# Altium PCB PCB1.PcbDoc
Units mil, origin at the board's own origin, x right, y up, seen from the top; angles counter-clockwise.
Board outline 6000 x 4000 mil, 2 copper layers (Top Layer, Bottom Layer); 132 components, 85 nets, 527 pads, 0 vias.
Unrouted connection lines stored in the file: 195.
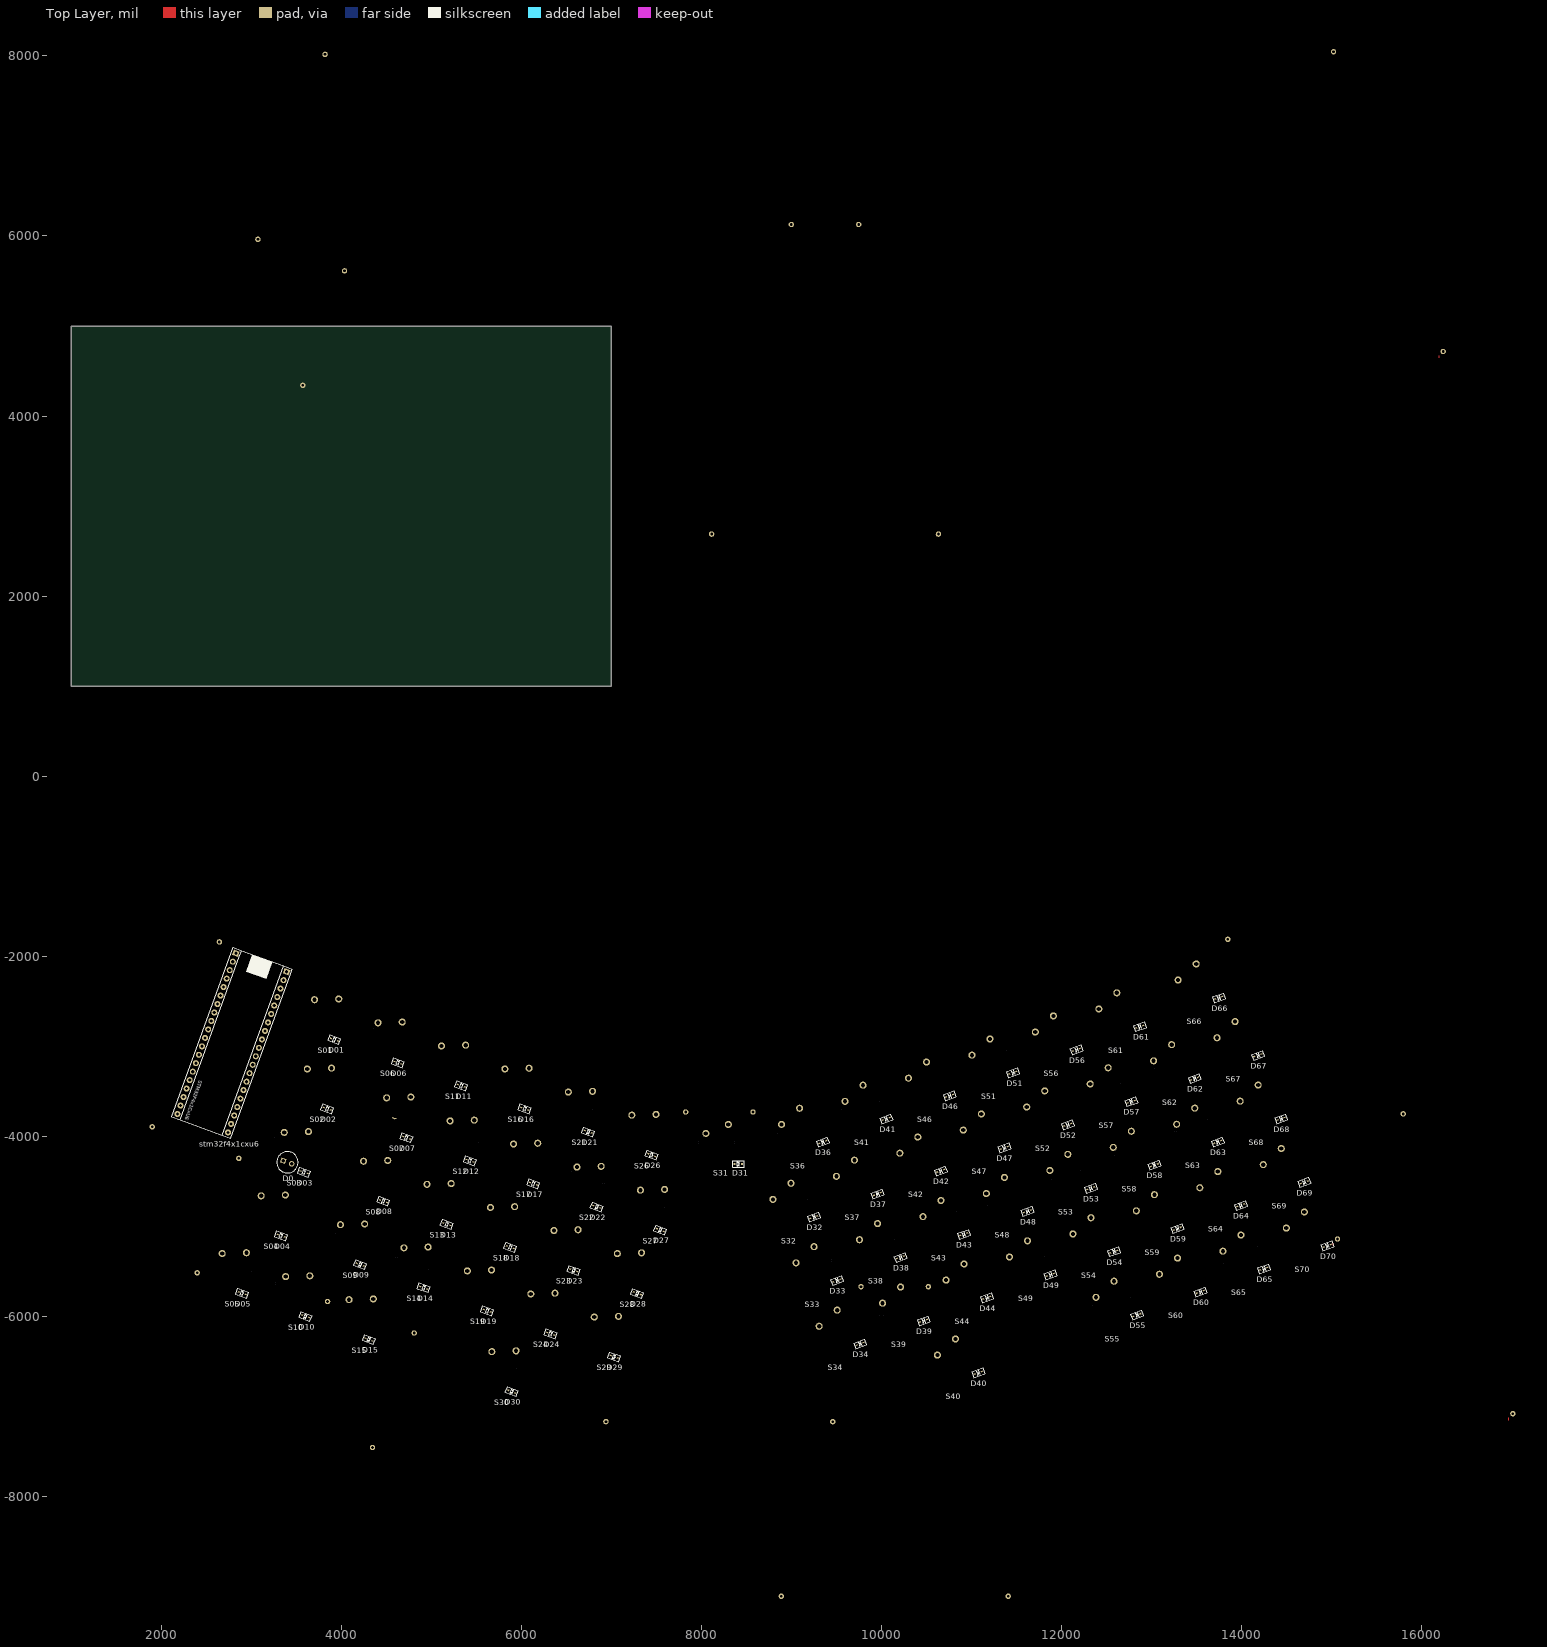
[diagram p0: Top Layer view]
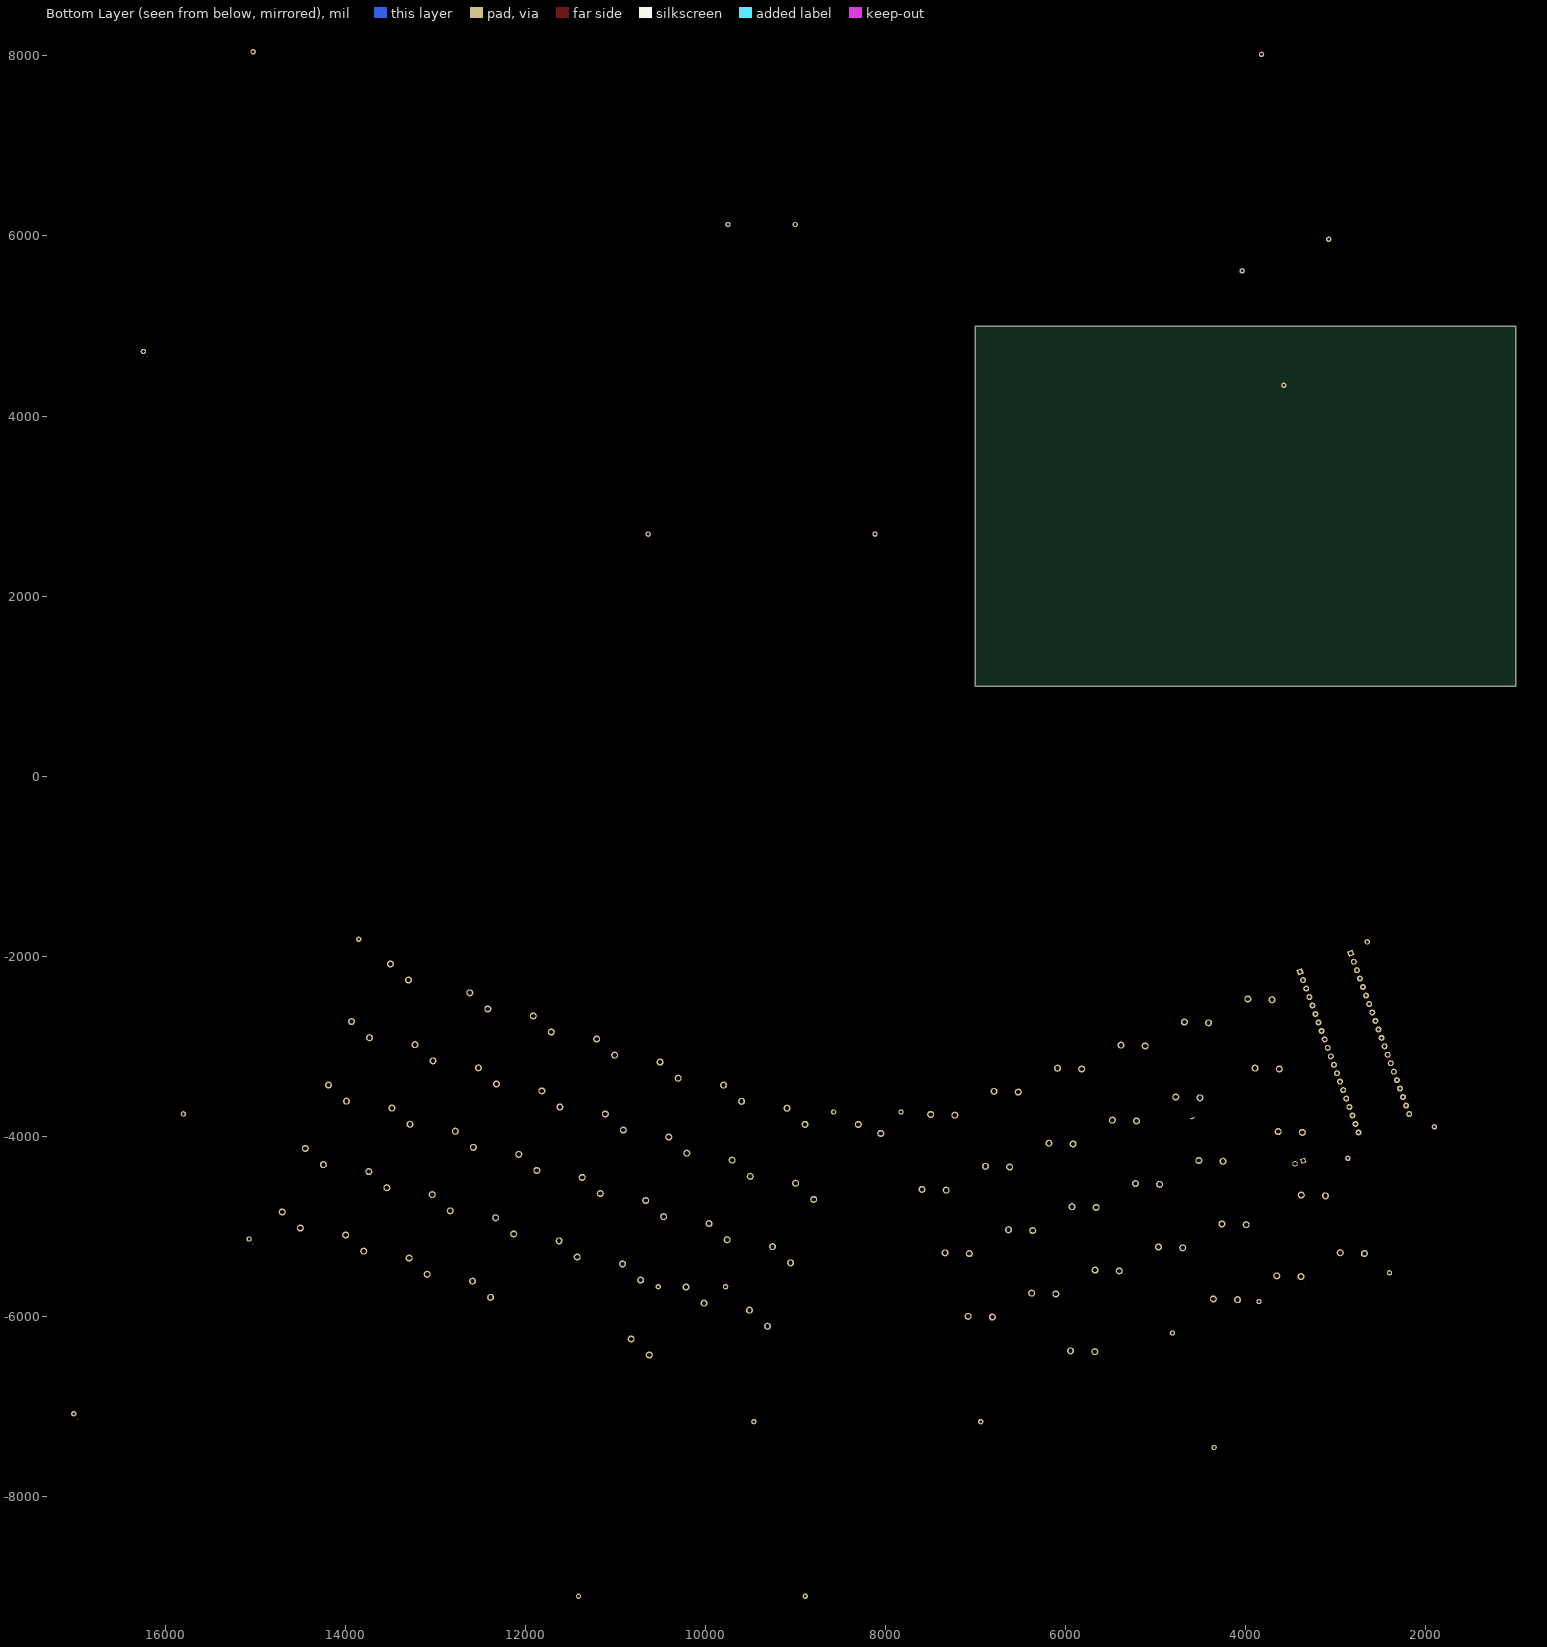
[diagram p1: Bottom Layer view, seen from below]

## Layer stack, top to bottom
Top Solder: solder mask 0.4, Solder Resist, Dk 3.5
Top Layer: signal copper 1.4
Dielectric 1: dielectric 12.6, FR-4, Dk 4.8
Bottom Layer: signal copper 1.4
Bottom Solder: solder mask 0.4, Solder Resist, Dk 3.5

## Board outline
1000,1000 7000,1000 7000,5000 1000,5000

## Design rules (kind name [scope] priority, off if disabled: settings)
Clearance [All] p1: gap=10 ignorepadtopadclearanceinfootprint=FALSE except(0: Arc-Hole Track-Hole SMDPad-Hole THPad-Hole Via-Hole Fill-Hole Poly-Hole Region-Hole Text-Hole)
PolygonConnect [All] p1: connectstyle=Relief reliefconductorwidth=10 reliefentries=4 polygonreliefangle="90 Angle" airgapwidth=10
RoomDefinition Matrix [InComponentClass('Matrix')] p1: confinementstyle=ConfineIn formatcopy=TRUE lockcomponents=FALSE outline 0,0 2000,0 2000,1000 0,1000
RoutingVias [All] p1: holewidth=28 width=50 viastyle="Through Hole" minholewidth=28 minwidth=50 maxholewidth=28 maxwidth=50
SolderMaskExpansion [All] p1: expansion=4
Width [All] p1: maxlimit=10 minlimit=10 preferedwidth=10
30 further rules are at their usual default settings.

## Components (designator, comment, footprint, x,y, rotation, side; value= is the part's Value field where it differs from the comment)
D0 "LED0" LED 3403.93,-4289.95 r340 top
D01 "1N4148" SOD323 3926.78,-2926.55 r160 top
D02 "1N4148" SOD323 3847.36,-3695.78 r160 top
D03 "1N4148" SOD323 3588.49,-4399.69 r160 top
D04 "1N4148" SOD323 3334.33,-5105.32 r160 top
D05 "1N4148" SOD323 2900.71,-5745.63 r160 top
D06 "1N4148" SOD323 4631.54,-3183.06 r160 top
D07 "1N4148" SOD323 4727.41,-4016.09 r160 top
D08 "1N4148" SOD323 4470.9,-4720.86 r160 top
D09 "1N4148" SOD323 4214.38,-5425.63 r160 top
D10 "1N4148" SOD323 3605.48,-6002.14 r160 top
D11 "1N4148" SOD323 5336.31,-3439.58 r160 top
D12 "1N4148" SOD323 5432.18,-4272.61 r160 top
D13 "1N4148" SOD323 5175.67,-4977.38 r160 top
D14 "1N4148" SOD323 4919.15,-5682.15 r160 top
D15 "1N4148" SOD323 4310.25,-6258.66 r160 top
D16 "1N4148" SOD323 6041.08,-3696.09 r160 top
D17 "1N4148" SOD323 6136.95,-4529.12 r160 top
D18 "1N4148" SOD323 5880.44,-5233.89 r160 top
D19 "1N4148" SOD323 5623.92,-5938.66 r160 top
D21 "1N4148" SOD323 6745.85,-3952.61 r160 top
D22 "1N4148" SOD323 6841.72,-4785.64 r160 top
D23 "1N4148" SOD323 6585.21,-5490.41 r160 top
D24 "1N4148" SOD323 6328.69,-6195.18 r160 top
D26 "1N4148" SOD323 7450.62,-4209.12 r160 top
D27 "1N4148" SOD323 7546.49,-5042.15 r160 top
D28 "1N4148" SOD323 7289.98,-5746.92 r160 top
D29 "1N4148" SOD323 7033.46,-6451.69 r160 top
D30 "1N4148" SOD323 5896.89,-6836.15 r160 top
D31 "1N4148" SOD323 8412.48,-4309.25 r180 top
D32 "1N4148" SOD323 9251.21,-4898.5 r200 top
D33 "1N4148" SOD323 9507.72,-5603.27 r200 top
D34 "1N4148" SOD323 9764.24,-6308.04 r200 top
D36 "1N4148" SOD323 9348.89,-4064.82 r200 top
D37 "1N4148" SOD323 9955.98,-4641.99 r200 top
D38 "1N4148" SOD323 10212.49,-5346.76 r200 top
D39 "1N4148" SOD323 10469.01,-6051.53 r200 top
D40 "1N4148" SOD323 11076.46,-6628.56 r200 top
D41 "1N4148" SOD323 10053.66,-3808.3 r200 top
D42 "1N4148" SOD323 10659.3,-4386 r200 top
D43 "1N4148" SOD323 10915.82,-5090.77 r200 top
D44 "1N4148" SOD323 11172.33,-5795.54 r200 top
D46 "1N4148" SOD323 10758.43,-3551.79 r200 top
D47 "1N4148" SOD323 11365.51,-4128.96 r200 top
D48 "1N4148" SOD323 11622.03,-4833.73 r200 top
D49 "1N4148" SOD323 11878.54,-5538.5 r200 top
D51 "1N4148" SOD323 11461.75,-3295.8 r200 top
D52 "1N4148" SOD323 12070.28,-3872.44 r200 top
D53 "1N4148" SOD323 12326.8,-4577.21 r200 top
D54 "1N4148" SOD323 12583.31,-5281.98 r200 top
D55 "1N4148" SOD323 12839.83,-5986.75 r200 top
D56 "1N4148" SOD323 12167.97,-3038.76 r200 top
D57 "1N4148" SOD323 12775.05,-3615.93 r200 top
D58 "1N4148" SOD323 13031.57,-4320.7 r200 top
D59 "1N4148" SOD323 13288.08,-5025.47 r200 top
D60 "1N4148" SOD323 13544.6,-5730.24 r200 top
D61 "1N4148" SOD323 12871.29,-2782.77 r200 top
D62 "1N4148" SOD323 13479.82,-3359.41 r200 top
D63 "1N4148" SOD323 13736.34,-4064.18 r200 top
D64 "1N4148" SOD323 13992.85,-4768.95 r200 top
D65 "1N4148" SOD323 14249.37,-5473.72 r200 top
D66 "1N4148" SOD323 13749,-2463.31 r200 top
D67 "1N4148" SOD323 14184.59,-3102.9 r200 top
D68 "1N4148" SOD323 14441.11,-3807.67 r200 top
D69 "1N4148" SOD323 14697.62,-4512.44 r200 top
D70 "1N4148" SOD323 14954.14,-5217.21 r200 top
S01 "MX1A" KEY 3811.52,-2629.2 r340 top
S02 "MX1A" KEY 3731.2,-3398.1 r340 top
S03 "MX1A" KEY 3474.69,-4102.87 r340 top
S04 "MX1A" KEY 3218.17,-4807.64 r340 top
S05 "MX1A" KEY 2785.46,-5448.28 r340 top
S06 "MX1A" KEY 4516.29,-2885.71 r340 top
S07 "MX1A" KEY 4612.16,-3718.74 r340 top
S08 "MX1A" KEY 4355.65,-4423.51 r340 top
S09 "MX1A" KEY 4099.13,-5128.28 r340 top
S10 "MX1A" KEY 3490.23,-5704.79 r340 top
S11 "MX1A" KEY 5221.06,-3142.23 r340 top
S12 "MX1A" KEY 5316.93,-3975.26 r340 top
S13 "MX1A" KEY 5060.42,-4680.03 r340 top
S14 "MX1A" KEY 4803.9,-5384.79 r340 top
S15 "MX1A" KEY 4195,-5961.31 r340 top
S16 "MX1A" KEY 5925.83,-3398.74 r340 top
S17 "MX1A" KEY 6021.7,-4231.77 r340 top
S18 "MX1A" KEY 5765.19,-4936.54 r340 top
S19 "MX1A" KEY 5508.67,-5641.31 r340 top
S21 "MX1A" KEY 6630.6,-3655.26 r340 top
S22 "MX1A" KEY 6726.47,-4488.29 r340 top
S23 "MX1A" KEY 6469.96,-5193.06 r340 top
S24 "MX1A" KEY 6213.44,-5897.82 r340 top
S26 "MX1A" KEY 7335.37,-3911.77 r340 top
S27 "MX1A" KEY 7431.24,-4744.8 r340 top
S28 "MX1A" KEY 7174.73,-5449.57 r340 top
S29 "MX1A" KEY 6918.21,-6154.34 r340 top
S30 "MX1A" KEY 5780.73,-6538.47 r340 top
S31 "MX1A" KEY 8201.51,-4069.25 r0 top
S32 "MX1A" KEY 8971.79,-4744.8 r20 top
S33 "MX1A" KEY 9228.3,-5449.57 r20 top
S34 "MX1A" KEY 9484.82,-6154.34 r20 top
S36 "MX1A" KEY 9067.66,-3911.77 r20 top
S37 "MX1A" KEY 9676.56,-4488.29 r20 top
S38 "MX1A" KEY 9933.07,-5193.06 r20 top
S39 "MX1A" KEY 10189.59,-5897.82 r20 top
S40 "MX1A" KEY 10798.49,-6474.34 r20 top
S41 "MX1A" KEY 9772.43,-3655.26 r20 top
S42 "MX1A" KEY 10381.32,-4231.77 r20 top
S43 "MX1A" KEY 10637.84,-4936.54 r20 top
S44 "MX1A" KEY 10894.36,-5641.31 r20 top
S46 "MX1A" KEY 10477.19,-3398.74 r20 top
S47 "MX1A" KEY 11086.09,-3975.26 r20 top
S48 "MX1A" KEY 11342.61,-4680.03 r20 top
S49 "MX1A" KEY 11599.12,-5384.79 r20 top
S51 "MX1A" KEY 11181.96,-3142.23 r20 top
S52 "MX1A" KEY 11790.86,-3718.74 r20 top
S53 "MX1A" KEY 12047.38,-4423.51 r20 top
S54 "MX1A" KEY 12303.89,-5128.28 r20 top
S55 "MX1A" KEY 12560.41,-5833.05 r20 top
S56 "MX1A" KEY 11886.73,-2885.71 r20 top
S57 "MX1A" KEY 12495.63,-3462.23 r20 top
S58 "MX1A" KEY 12752.15,-4166.99 r20 top
S59 "MX1A" KEY 13008.66,-4871.76 r20 top
S60 "MX1A" KEY 13265.18,-5576.53 r20 top
S61 "MX1A" KEY 12591.5,-2629.2 r20 top
S62 "MX1A" KEY 13200.4,-3205.71 r20 top
S63 "MX1A" KEY 13456.92,-3910.48 r20 top
S64 "MX1A" KEY 13713.43,-4615.25 r20 top
S65 "MX1A" KEY 13969.95,-5320.02 r20 top
S66 "MX1A" KEY 13472.46,-2308.55 r20 top
S67 "MX1A" KEY 13905.17,-2949.2 r20 top
S68 "MX1A" KEY 14161.69,-3653.96 r20 top
S69 "MX1A" KEY 14418.2,-4358.73 r20 top
S70 "MX1A" KEY 14674.72,-5063.5 r20 top
stm32f4x1cxu6 "U1" STM32F4X1CXU6_CORE 2761.27,-2964.09 r250 top

## Footprints (in the part's own frame and the unit in brackets; to place one, negate y for a bottom-side part, rotate by r counter-clockwise, add the part's x,y. Pads: shape width x height; smd on the part's side, far side on the other; paste and mask are expansions set on the pad)
KEY [mm]
  round 2 hole 1.2: 1(-3.8,2.54) 2(2.54,5.08)
  round 1.524 hole 2: 6(-5.08,0) 7(5.08,0)
  round 1.524 hole 4: 6(0,0)
LED [mil]
  rect 60x60 hole 39.37: 1(-49.21,0)
  round 60 hole 39.37: 2(49.21,0)
  silkscreen extent -118,-118 118,118
SOD323 [mm]
  rect 0.59x0.45 smd: 1(1.055,0) 2(-1.055,0)
  silkscreen extent -1.63,-0.86 1.63,0.86, body extent -1.3,-0.65 1.3,0.65, height 1
STM32F4X1CXU6_CORE [mm]
  rect 1.7x1.7 hole 0.9: 1(-24.384,-6.985) 40(-24.384,8.23)
  round 1.7 hole 0.9: 2(-21.844,-6.985) 3(-19.304,-6.985) 4(-16.764,-6.985) 5(-14.224,-6.985) 6(-11.684,-6.985) 7(-9.144,-6.985) 8(-6.604,-6.985) 9(-4.064,-6.985) 10(-1.524,-6.985) 11(1.016,-6.985) 12(3.556,-6.985) 13(6.096,-6.985) 14(8.636,-6.985) 15(11.176,-6.985) 16(13.716,-6.985) 17(16.256,-6.985) 18(18.796,-6.985) 19(21.336,-6.985) 20(23.876,-6.985) 21(23.876,8.23) 22(21.336,8.23) 23(18.796,8.23) 24(16.256,8.23) 25(13.716,8.23) 26(11.176,8.23) 27(8.636,8.23) 28(6.096,8.23) 29(3.556,8.23) 30(1.016,8.23) 31(-1.524,8.23) 32(-4.064,8.23) 33(-6.604,8.23) 34(-9.144,8.23) 35(-11.684,8.23) 36(-14.224,8.23) 37(-16.764,8.23) 38(-19.304,8.23) 39(-21.844,8.23)
  silkscreen extent -25.65,-8.26 25.15,9.5

## Part data
D0: "Typical INFRARED GaAs LED", LatestRevisionDate=08-Jul-2005, LatestRevisionNote="Mech Layer 1 removed.", PackageDescription="LED; 2 Leads", PackageReference=LED-0, Published=8-Jun-2000, Publisher="Altium Limited"
D01 D02 D03 D04 D05 D06 D07 D08 D09 D10 D11 D12 D13 D14 D15 D16 D17 D18 D19 D21 D22 D23 D24 D26 D27 D28 D29 D30 D31 D32 D33 D34 D36 D37 D38 D39 D40 D41 D42 D43 D44 D46 D47 D48 D49 D51 D52 D53 D54 D55 D56 D57 D58 D59 D60 D61 D62 D63 D64 D65 D66 D67 D68 D69 D70: "二极管"
S01 S02 S03 S04 S05 S06 S07 S08 S09 S10 S11 S12 S13 S14 S15 S16 S17 S18 S19 S21 S22 S23 S24 S26 S27 S28 S29 S30 S31 S32 S33 S34 S36 S37 S38 S39 S40 S41 S42 S43 S44 S46 S47 S48 S49 S51 S52 S53 S54 S55 S56 S57 S58 S59 S60 S61 S62 S63 S64 S65 S66 S67 S68 S69 S70: "按键"
stm32f4x1cxu6: library part stm32f4x1cxu6_core

## Free pads (board coordinates)
  round 60 hole 30: 18(15068.42,-5142.24) 18(16242.42,4716.76) 18(17016.42,-7082.24) 19(13850.42,-1812.49) 19(15024.42,8046.51) 19(15798.42,-3752.49) 20(8575.53,-3731.46) 20(9749.53,6127.54) 20(10523.53,-5671.46) 21(7827.5,-3731.46) 21(9001.5,6127.54) 21(9775.5,-5671.46) 22(2647.75,-1841.8) 22(3821.75,8017.2) 22(4595.75,-3781.8) 23(1901.85,-3896.55) 23(3075.85,5962.45) 23(3849.85,-5836.55) 24(2863.84,-4246.65) 24(4037.84,5612.35) 24(4811.84,-6186.65) 25(2400.71,-5517.72) 25(3574.71,4341.28) 25(4348.71,-7457.72) 26(6941.67,-7170.5) 26(8115.67,2688.5) 26(8889.67,-9110.5) 27(9461.36,-7170.5) 27(10635.36,2688.5) 27(11409.36,-9110.5)

## Nets (pads, with @x,y where several pads share a name; then routed paths per layer and width w, separated by ;. In a path a pad name is that pad's centre, name@x,y a point inside that pad or via, vN(x,y) a via of type N, cw(c..) or ccw(c..) an arc to the next point about the centre after c; other vN are vias at no path point)
NetD0_1: D0.1 stm32f4x1cxu6.20
NetD0_2: D0.2 stm32f4x1cxu6.4
NetD01_1: D01.1 S01.2
NetD01_2: D01.2 D02.2 D03.2 D04.2 D05.2 stm32f4x1cxu6.34
NetD02_1: D02.1 S02.2
NetD03_1: D03.1 S03.2
NetD04_1: D04.1 S04.2
NetD05_1: D05.1 S05.2
NetD06_1: D06.1 S06.2
NetD06_2: D06.2 D08.2 D09.2 D10.2 stm32f4x1cxu6.35
NetD08_1: D08.1 S08.2
NetD09_1: D09.1 S09.2
NetD10_1: D10.1 S10.2
NetD11_1: D11.1 S11.2
NetD11_2: D11.2 D12.2 D13.2 D14.2 D15.2 stm32f4x1cxu6.36
NetD12_1: D12.1 S12.2
NetD13_1: D13.1 S13.2
NetD14_1: D14.1 S14.2
NetD15_1: D15.1 S15.2
NetD16_1: D16.1 S16.2
NetD16_2: D16.2 D17.2 D18.2 D19.2 stm32f4x1cxu6.11
NetD17_1: D17.1 S17.2
NetD18_1: D18.1 S18.2
NetD19_1: D19.1 S19.2
NetD21_1: D21.1 S21.2
NetD21_2: D21.2 D22.2 D23.2 D24.2 D30.2 stm32f4x1cxu6.12
NetD22_1: D22.1 S22.2
NetD23_1: D23.1 S23.2
NetD24_1: D24.1 S24.2
NetD26_1: D26.1 S26.2
NetD26_2: D26.2 D27.2 D28.2 D29.2 stm32f4x1cxu6.13
NetD27_1: D27.1 S27.2
NetD28_1: D28.1 S28.2
NetD29_1: D29.1 S29.2
NetD30_1: D30.1 S30.2
NetD31_1: D31.1 S31.2
NetD31_2: D31.2 D32.2 D33.2 D34.2 stm32f4x1cxu6.14
NetD32_1: D32.1 S32.2
NetD33_1: D33.1 S33.2
NetD34_1: D34.1 S34.2
NetD36_1: D36.1 S36.2
NetD36_2: D36.2 D37.2 D38.2 D39.2 D40.2 stm32f4x1cxu6.15
NetD37_1: D37.1 S37.2
NetD38_1: D38.1 S38.2
NetD39_1: D39.1 S39.2
NetD40_1: D40.1 S40.2
NetD41_1: D41.1 S41.2
NetD41_2: D41.2 D42.2 D43.2 D44.2 stm32f4x1cxu6.16
NetD42_1: D42.1 S42.2
NetD43_1: D43.1 S43.2
NetD44_1: D44.1 S44.2
NetD46_1: D46.1 S46.2
NetD46_2: D46.2 D47.2 D48.2 D49.2 stm32f4x1cxu6.17
NetD47_1: D47.1 S47.2
NetD48_1: D48.1 S48.2
NetD49_1: D49.1 S49.2
NetD51_1: D51.1 S51.2
NetD51_2: D51.2 D52.2 D53.2 D54.2 D55.2 stm32f4x1cxu6.37
NetD52_1: D52.1 S52.2
NetD53_1: D53.1 S53.2
NetD54_1: D54.1 S54.2
NetD55_1: D55.1 S55.2
NetD56_1: D56.1 S56.2
NetD56_2: D56.2 D57.2 D58.2 D59.2 D60.2 stm32f4x1cxu6.1
NetD57_1: D57.1 S57.2
NetD58_1: D58.1 S58.2
NetD59_1: D59.1 S59.2
NetD60_1: D60.1 S60.2
NetD61_1: D61.1 S61.2
NetD61_2: D61.2 D62.2 D63.2 D64.2 D65.2 stm32f4x1cxu6.2
NetD62_1: D62.1 S62.2
NetD63_1: D63.1 S63.2
NetD64_1: D64.1 S64.2
NetD65_1: D65.1 S65.2
NetD66_1: D66.1 S66.2
NetD66_2: D66.2 D67.2 D68.2 D69.2 D70.2 stm32f4x1cxu6.3
NetD67_1: D67.1 S67.2
NetD68_1: D68.1 S68.2
NetD69_1: D69.1 S69.2
NetD70_1: D70.1 S70.2
NetS01_1: S01.1 S06.1 S11.1 S16.1 S21.1 S26.1 S31.1 S36.1 S41.1 S46.1 S51.1 S56.1 S61.1 S66.1 stm32f4x1cxu6.27
NetS02_1: S02.1 S07.1 S12.1 S17.1 S22.1 S27.1 S32.1 S37.1 S42.1 S47.1 S52.1 S57.1 S62.1 S67.1 stm32f4x1cxu6.28
NetS03_1: S03.1 S08.1 S13.1 S18.1 S23.1 S28.1 S33.1 S38.1 S43.1 S48.1 S53.1 S58.1 S63.1 S68.1 stm32f4x1cxu6.29
NetS04_1: S04.1 S09.1 S14.1 S19.1 S24.1 S29.1 S34.1 S39.1 S44.1 S49.1 S54.1 S59.1 S64.1 S69.1 stm32f4x1cxu6.30
NetS05_1: S05.1 S10.1 S15.1 S30.1 S40.1 S55.1 S60.1 S65.1 S70.1 stm32f4x1cxu6.31
pads on no net: D07.1 D07.2 S01.6 S01.7 S02.6 S02.7 S03.6 S03.7 S04.6 S04.7 S05.6 S05.7 S06.6 S06.7 S07.2 S07.6 S07.7 S08.6 S08.7 S09.6 S09.7 S10.6 S10.7 S11.6 S11.7 S12.6 S12.7 S13.6 S13.7 S14.6 S14.7 S15.6 S15.7 S16.6 S16.7 S17.6 S17.7 S18.6 S18.7 S19.6 S19.7 S21.6 S21.7 S22.6 S22.7 S23.6 S23.7 S24.6 S24.7 S26.6 S26.7 S27.6 S27.7 S28.6 S28.7 S29.6 S29.7 S30.6 S30.7 S31.6 S31.7 S32.6 S32.7 S33.6 S33.7 S34.6 S34.7 S36.6 S36.7 S37.6 S37.7 S38.6 S38.7 S39.6 S39.7 S40.6 S40.7 S41.6 S41.7 S42.6 S42.7 S43.6 S43.7 S44.6 S44.7 S46.6 S46.7 S47.6 S47.7 S48.6 S48.7 S49.6 S49.7 S51.6 S51.7 S52.6 S52.7 S53.6 S53.7 S54.6 S54.7 S55.6 S55.7 S56.6 S56.7 S57.6 S57.7 S58.6 S58.7 S59.6 S59.7 S60.6 S60.7 S61.6 S61.7 S62.6 S62.7 S63.6 S63.7 S64.6 S64.7 S65.6 S65.7 S66.6 S66.7 S67.6 S67.7 S68.6 S68.7 S69.6 S69.7 S70.6 S70.7 stm32f4x1cxu6.5 stm32f4x1cxu6.6 stm32f4x1cxu6.7 stm32f4x1cxu6.8 stm32f4x1cxu6.9 stm32f4x1cxu6.10 stm32f4x1cxu6.18 stm32f4x1cxu6.19 stm32f4x1cxu6.21 stm32f4x1cxu6.22 stm32f4x1cxu6.23 stm32f4x1cxu6.24 stm32f4x1cxu6.25 stm32f4x1cxu6.26 stm32f4x1cxu6.32 stm32f4x1cxu6.33 stm32f4x1cxu6.38 stm32f4x1cxu6.39 stm32f4x1cxu6.40
copper on no net: | length 80
  Top Layer w10: 15022.11,-5213.56 15022.11,-5186.89 ; 16196.11,4645.44 16196.11,4672.11 ; 16970.11,-7153.56 16970.11,-7126.89

## Silkscreen, mask and mechanical layers (free items; w line width, h text height)
Mechanical 1:
  lines w10: 779,-7501.98 15149,-7501.98 15149,-1598 779,-1598 779,-7501.98 ; 1953,2357.02 16323,2357.02 16323,8261 1953,8261 1953,2357.02 ; 2727,-9441.98 17097,-9441.98 17097,-3538 2727,-3538 2727,-9441.98

## Text inside footprints (layer, text, board x,y; h text height)
stm32f4x1cxu6: Top Overlay "STM32F4x1CxU6" at 2405.31,-3371.94 h70 r250